# EAGLE board bottom (EAGLE 7.6.0)
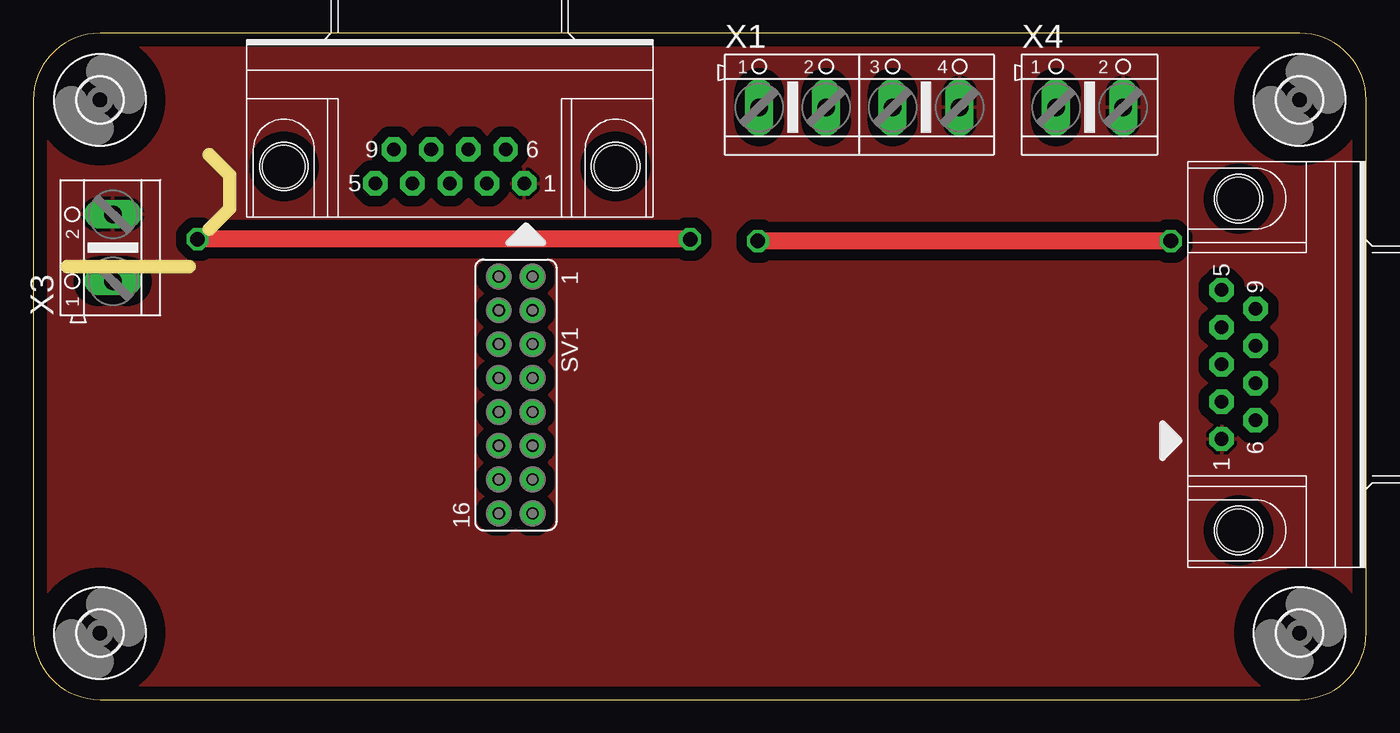
[diagram p0: board, top side]
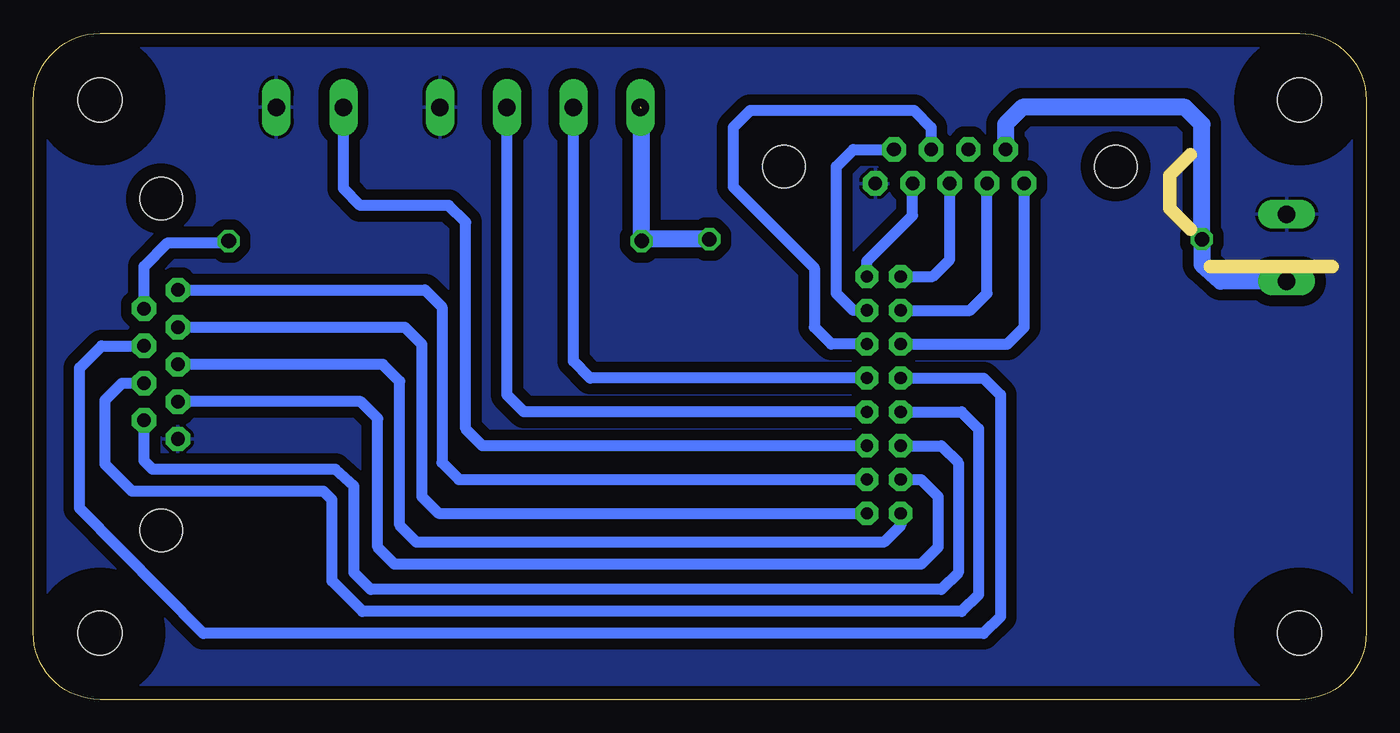
[diagram p1: board, bottom side, seen from below]

Size 100 x 50 mm. Coordinates in mm from the lower left corner, seen from the top.
Outline: 0,45 0,5 arc90 5,0 95,0 arc90 100,5 100,45 arc90 95,50 5,50 arc90 0,45
Copper layers (1*16): Top 0.035mm / dielectric 1.5mm / Bottom 0.035mm
Design rules "default *": minimum track width 6mil, minimum drill 0.35mm, track to track 6mil, track to pad 6mil, pad to pad 6mil, via to via 6mil, smd to smd 6mil, copper to edge 40mil, drill to drill 6mil, minimum pad ring 16mil, minimum via ring 8mil, stop-mask expansion 4mil, vias tented up to drill 0mil, thermal gap 10mil
Net classes: 0 default: width 0.203 mm; 1 vcc: width 0.254 mm
Milling: 4 lines

## Footprints (pad centres in the part's own frame; a part is rotated, then mirrored left to right if it is on the bottom)
D-09M/90 = drill 1.016 pad 1.575 octagon: 1 5.588,-1.27; 2 2.794,-1.27; 3 0,-1.27; 4 -2.794,-1.27; 5 -5.588,-1.27; 6 4.191,1.27; 7 1.397,1.27; 8 -1.397,1.27; 9 -4.191,1.27 | hole 3.2: 12.446,0; -12.446,0
FE08-2 = drill 0.914 octagon: 1 -8.89,1.27; 2 -8.89,-1.27; 3 -6.35,1.27; 4 -6.35,-1.27; 5 -3.81,1.27; 6 -3.81,-1.27; 7 -1.27,1.27; 8 -1.27,-1.27; 9 1.27,1.27; 10 1.27,-1.27; 11 3.81,1.27; 12 3.81,-1.27; 13 6.35,1.27; 14 6.35,-1.27; 15 8.89,1.27; 16 8.89,-1.27
3,3 = hole 3.3: 0,0
AK500/4 = drill 1.321 long: 1 -7.518,0; 2 -2.489,0; 3 2.489,0; 4 7.518,0
AK500/2 = drill 1.321 long: 1 -2.515,0; 2 2.515,0

## Placement (x,y rotation side)
CON1  [D-09M/90]  90.42,25.15 270 top
CON2  [D-09M/90]  31.24,40.01 0 top
SV1  [FE08-2]  36.2,22.86 270 top
U$1  [3,3]  5,5 0 top
U$2  [3,3]  5,45 0 top
U$3  [3,3]  95,45 0 top
U$4  [3,3]  95,5 0 top
X1  [AK500/4]  61.98,44.45 0 top
X3  [AK500/2]  5.97,33.91 90 top
X4  [AK500/2]  79.25,44.45 0 top

## Library data of the parts
CON1 CON2 = connect
SV1 = con-lsta; OC_FARNELL: unknown; OC_NEWARK: unknown
U$1-U$4 = holes
X1 X3 X4 = con-ptr500; OC_FARNELL: unknown; OC_NEWARK: unknown

## Nets
A0: CON2.3 SV1.2
A1: CON2.4 SV1.4
A2: CON2.5 SV1.6
A3: CON1.8 SV1.8
A4: CON1.7 SV1.10
A5: CON1.6 SV1.12
A6: CON1.2 SV1.14
A7: CON1.3 SV1.16
D5: SV1.9 X1.3
D6: SV1.7 X1.2
D7: CON2.7 SV1.5
D8: CON2.6 SV1.3
D9: CON2.2 SV1.1
GND: CON1.1 CON2.1 X1.4 X3.2 X4.2
RESET: SV1.11 X4.1
RXI: CON1.5 SV1.13
TXO: CON1.4 SV1.15
VCC: CON1.9 CON2.9 X1.1 X3.1

## Tracks (layer width: path | path; a pad name or v marks a point on that pad's centre or on a via)
A0
  Bottom 0.813: SV1.2 32.51,31.75 31.24,33.02 CON2.3
A1
  Bottom 0.813: SV1.4 29.72,29.21 28.45,30.48 CON2.4
A2
  Bottom 0.813: SV1.6 26.92,26.67 25.65,27.94 CON2.5
A3
  Bottom 0.813: SV1.8 28.7,24.13 27.43,22.86 27.43,6.22 28.7,4.95 87.25,4.95 96.52,14.35 96.52,24.89 94.87,26.54 CON1.8
A4
  Bottom 0.813: SV1.10 30.35,21.59 29.08,20.32 29.08,7.87 30.35,6.6 75.31,6.6 77.6,8.89 77.6,14.99 78.23,15.62 92.58,15.62 94.61,17.65 94.61,22.48 93.34,23.75 CON1.7
A5
  Bottom 0.813: SV1.12 31.88,19.05 30.61,17.78 30.61,9.53 31.88,8.26 74.68,8.26 75.95,9.53 75.95,16 77.34,17.27 91.06,17.27 91.69,17.91 CON1.6
A6
  Bottom 0.813: SV1.14 33.4,16.51 32.13,15.24 32.13,11.43 33.4,10.16 72.9,10.16 74.17,11.43 74.17,21.08 75.44,22.35 CON1.2
A7
  Bottom 0.813: SV1.16 34.92,13.08 36.2,11.81 71.25,11.81 72.52,13.08 72.52,23.88 73.79,25.15 CON1.3
D5
  Bottom 0.813: SV1.9 63.2,21.59 64.47,22.86 X1.3
D6
  Bottom 0.813: SV1.7 58.22,24.13 59.49,25.4 X1.2
D7
  Bottom 0.813: SV1.5 40.13,26.67 41.4,27.94 41.4,32.38 47.5,38.48 47.5,42.93 46.23,44.2 33.91,44.2 32.64,42.93 CON2.7
D8
  Bottom 0.813: SV1.3 38.48,29.21 39.75,30.48 39.75,40.01 38.48,41.27 CON2.6
D9
  Bottom 0.813: SV1.1 37.47,32.89 34.04,36.32 CON2.2
GND
  pour Bottom (isolate 0.813, rank 6): 0,50.67 101.09,51.69 100.84,-0.89 -0.01,-0.83
  pour Top (isolate 0.813, rank 6): 100.84,50.29 0.13,50.55 -0.51,-0.38 100.59,-0.83
RESET
  Bottom 0.813: X4.1 76.73,38.35 75.46,37.08 68.83,37.08 67.56,35.81 67.56,20.32 66.29,19.05 SV1.11
RXI
  Bottom 0.813: CON1.5 70.61,30.73 69.34,29.46 69.34,17.78 68.07,16.51 SV1.13
TXO
  Bottom 0.813: CON1.4 72.14,27.94 70.87,26.67 70.87,15.24 69.6,13.97 SV1.15
VCC  (via drill 1.1)  (1 unrouted)
  Top 1.27: v85.34,34.42 v54.36,34.42 | v49.28,34.54 v12.32,34.54
  Bottom 0.813: CON1.9 91.69,32.51 89.92,34.29 85.47,34.29 v85.34,34.42
  Bottom 1.016: 5.97,31.24 X3.1
  Bottom 1.27: X3.1 10.92,31.39 12.32,32.66 v12.32,34.54 12.32,43.18 13.59,44.45 25.78,44.45 27.05,43.18 CON2.9 | v49.28,34.54 54.23,34.54 v54.36,34.42 54.36,44.35

## Text on the board
tValues: GND D9 A0 A1 A2 / D8 D7 N/C VCC | (-) | VCC D6 D5 GND | RST GND | (+) | GND A6 A7 RXI TXO / A5 A4 A3 VCC | Donadello / Abosso / 2021